# Altium PCB MT_MD_Converter.PcbDoc
Units mm, origin at the board's own origin, x right, y up, seen from the top; angles counter-clockwise.
Board outline 93.8 x 61.9 mm, 2 copper layers (Top Layer, Bottom Layer), stack 1.57 mm thick; 6 components, 61 nets, 224 pads, 50 vias.
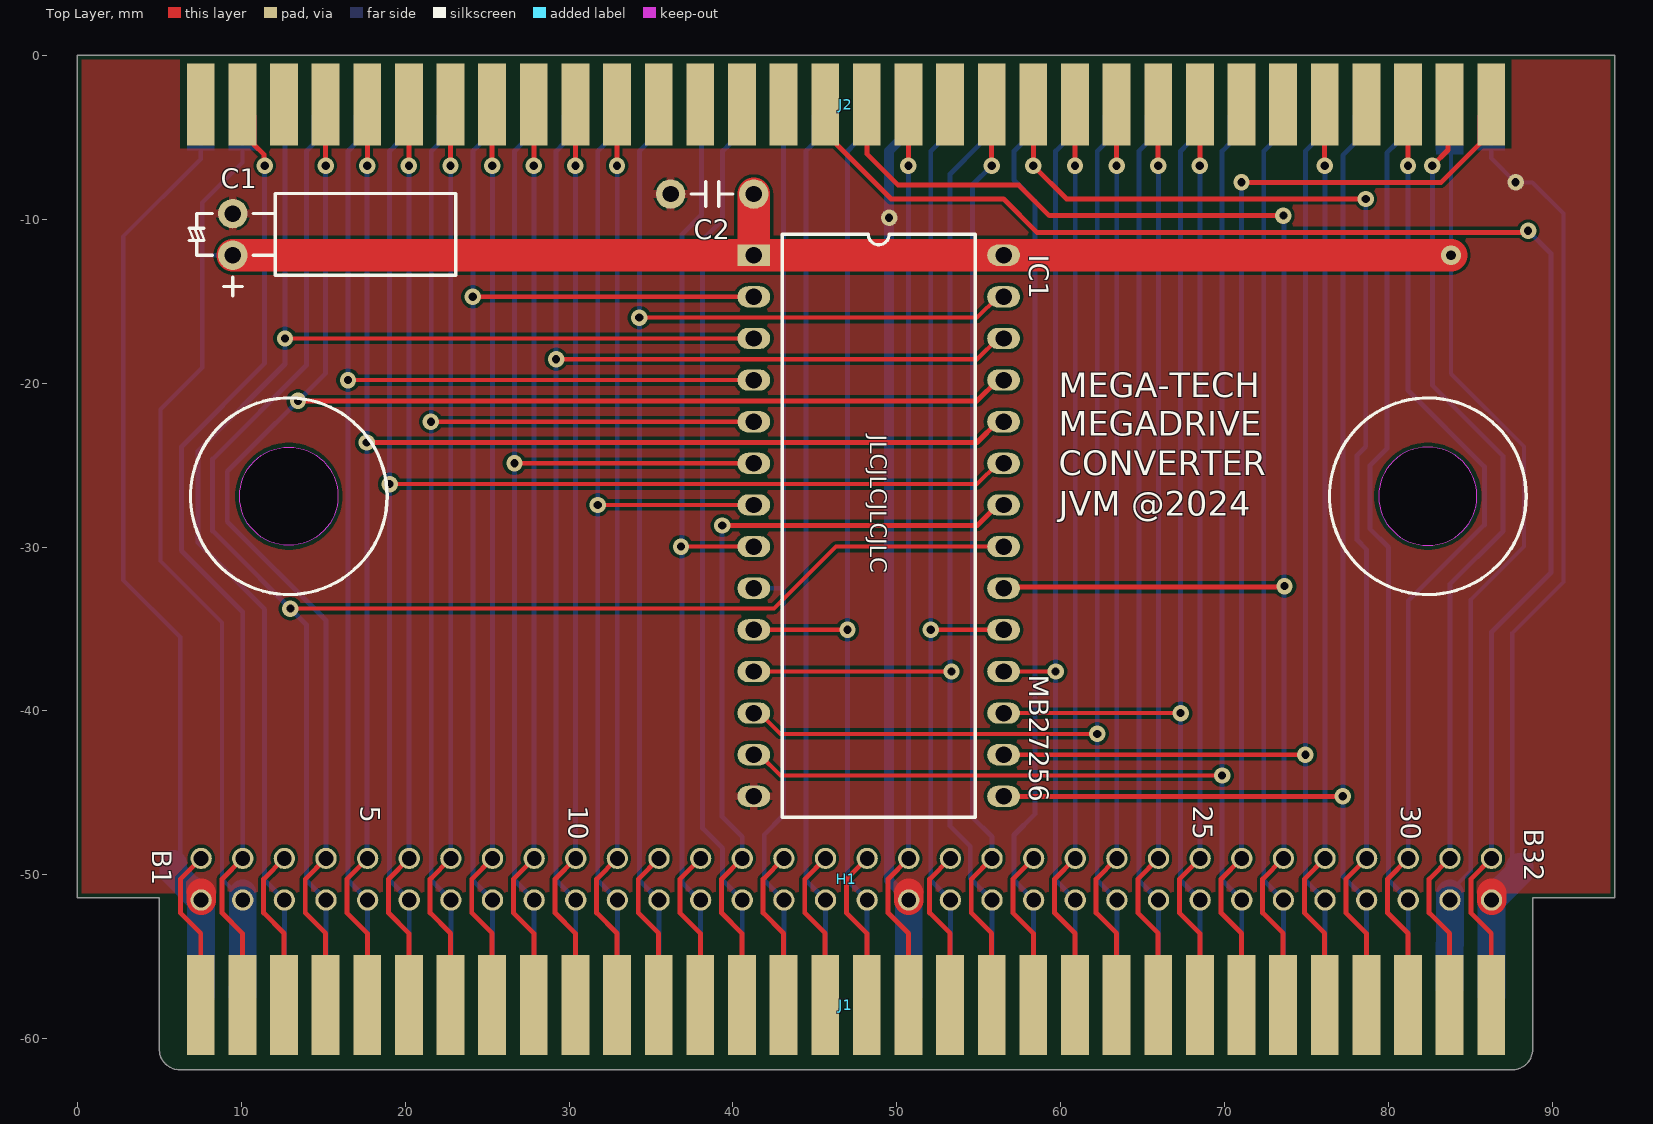
[diagram p0: Top Layer view]
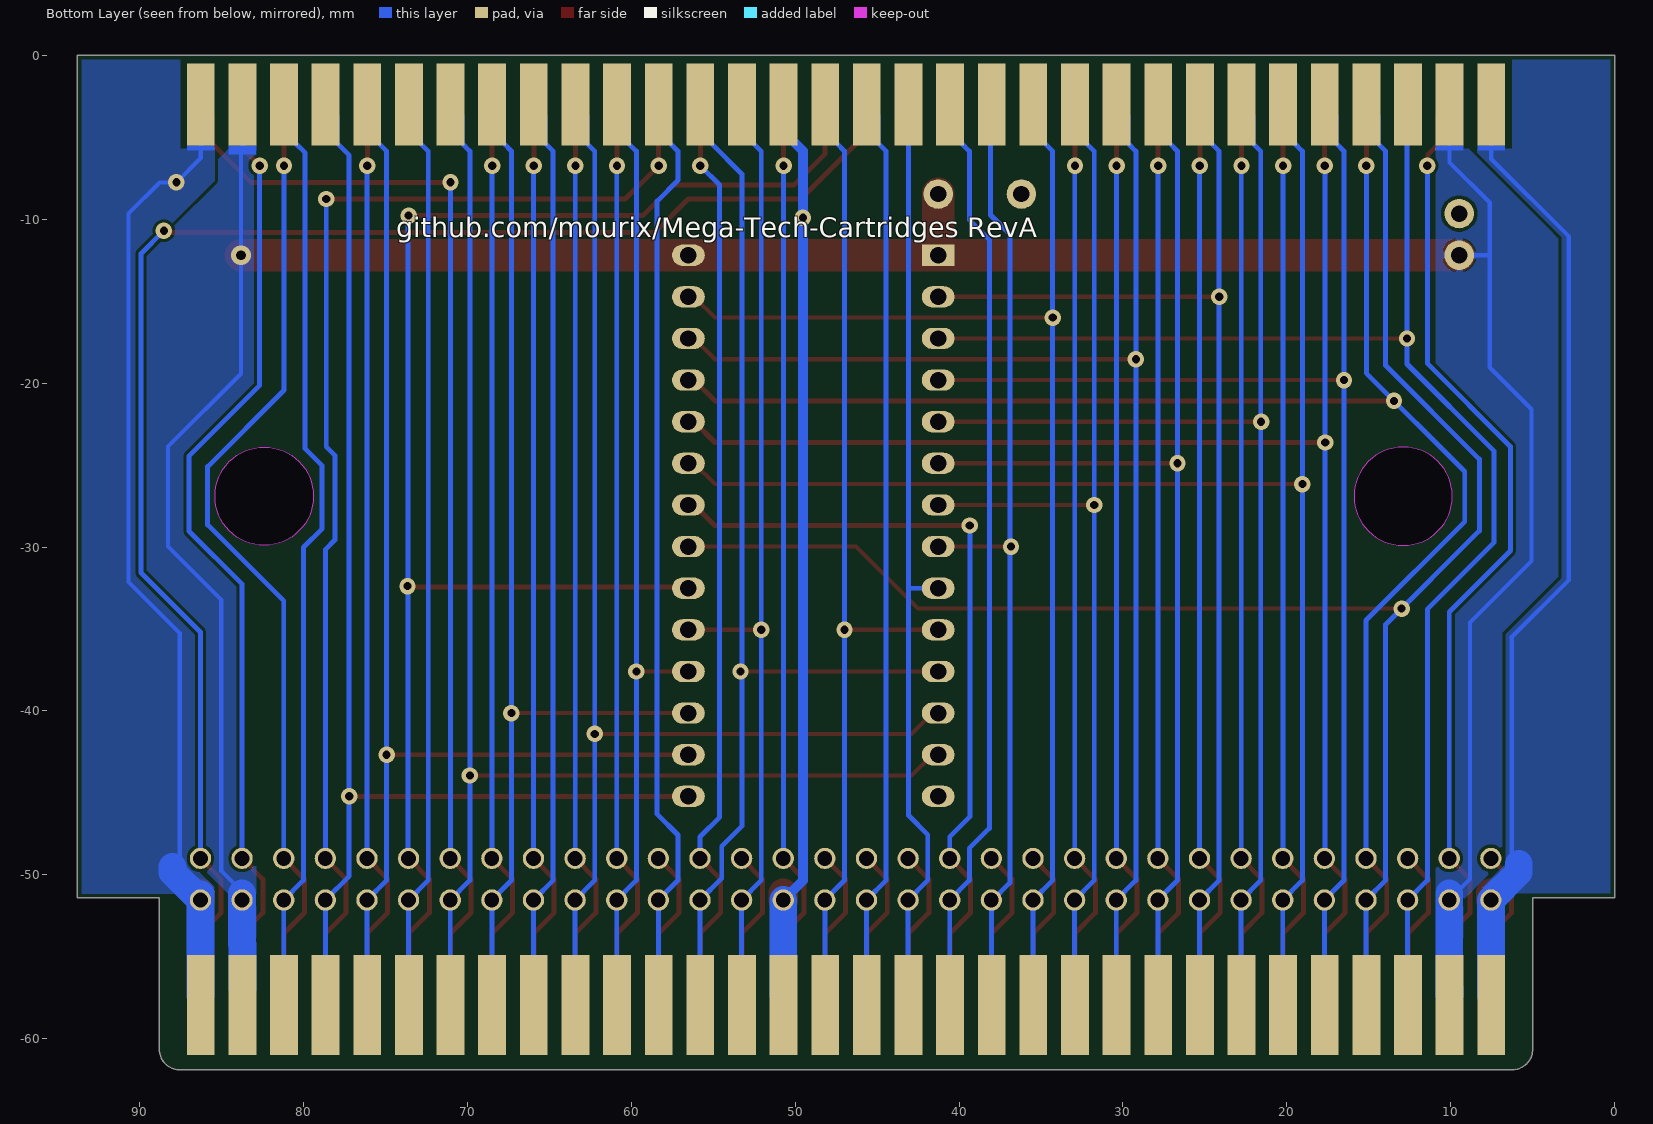
[diagram p1: Bottom Layer view, seen from below]

## Layer stack, top to bottom
Top Solder: solder mask 0.0127, Solder Resist, Dk 3.8
Top Layer: signal copper 0.035
Dielectric: core 1.5, FR-4, Dk 4.5
Bottom Layer: signal copper 0.035
Bottom Solder: solder mask 0.0127, Solder Resist, Dk 3.8

## Board outline
5,-60.632 5,-51.4 0,-51.4 0,0 93.8,0 93.8,-51.4 88.8,-51.4 88.8,-60.668 cw(c87.55,-60.65) 87.532,-61.9 87.55,-61.9 6.25,-61.9 6.232,-61.9 cw(c6.25,-60.65)
cut-out: 79.4,-26.9 ccw(c82.4,-26.9) 82.4,-29.9 ccw(c82.4,-26.9) 85.4,-26.9 ccw(c82.4,-26.9) 82.4,-23.9 ccw(c82.4,-26.9)
cut-out: 12.9,-29.9 cw(c12.9,-26.9) 9.9,-26.9 cw(c12.9,-26.9) 12.9,-23.9 cw(c12.9,-26.9) 15.9,-26.9 cw(c12.9,-26.9)

## Design rules (kind name [scope] priority, off if disabled: settings)
BoardOutlineClearance [not InComponent('J1')] p1: gap=0.254 ignorepadtopadclearanceinfootprint=FALSE
Clearance [All] p1: gap=0.2 ignorepadtopadclearanceinfootprint=FALSE except(0.15: Arc-Text Track-Text SMDPad-Text THPad-Text Via-Text Fill-Text Poly-Text Region-Text Text-Text; 0.25: Arc-Hole Track-Hole SMDPad-Hole THPad-Hole Via-Hole Fill-Hole Poly-Hole Region-Hole Text-Hole)
ComponentClearance [All] p1: gap=0.127 collisioncheckmode=3 verticalgap=0.127 showdistances=TRUE
DiffPairsRouting [All] p1: maxlimit=0.254 minlimit=0.127 mostfreqgap=0.127 toplayer_minwidth=0.127 toplayer_maxwidth=25.4 toplayer_prefwidth=0.127 bottomlayer_minwidth=0.127 bottomlayer_maxwidth=25.4 bottomlayer_prefwidth=0.127 maxuncoupledlength=12.7
Height [All] p1: minheight=0 maxheight=1816.048 prefheight=12.7
HoleSize [All] p1: absolutevalues=TRUE maxlimit=6.3 minlimit=0.3 maxpercent=80.000 minpercent=20.000
HoleToHoleClearance [All] p1: gap=0.25 allowstackedmicrovias=FALSE
MinimumAnnularRing [All] p1: minimumring=0.076
MinimumSolderMaskSliver [All] p1: minsoldermaskwidth=0.1
PlaneClearance [All] p1: clearance=0.15
PlaneConnect PlaneConnectPowerPads [InPadClass('PowerPads')] p1: planeconnectstyle=Direct reliefexpansion=0.508 reliefentries=4 reliefconductorwidth=0.254 reliefairgap=0.254
PlaneConnect [All] p2: pad.planeconnectstyle=Relief pad.reliefexpansion=0.3 pad.reliefentries=4 pad.reliefconductorwidth=0.127 pad.reliefairgap=0.127 via.planeconnectstyle=Direct via.reliefexpansion=0.3 via.reliefentries=4 via.reliefconductorwidth=0.127 via.reliefairgap=0.127
PolygonConnect PolygonConnect_via [IsVia] p1: connectstyle=Direct reliefconductorwidth=0.254 reliefentries=4 polygonreliefangle="90 Angle" airgapwidth=0.254
PolygonConnect [All] p2: connectstyle=Relief reliefconductorwidth=0.5 reliefentries=4 polygonreliefangle="90 Angle" airgapwidth=0.15
RoutingVias [All] p1: holewidth=0.3 width=0.6 viastyle="Through Hole" minholewidth=0.3 minwidth=0.6 maxholewidth=0.6 maxwidth=6.6
SilkToSilkClearance [All] p1: silktosilkclearance=0
SilkToSolderMaskClearance [IsPad] p1: minsilkscreentomaskgap=0.127 clearancetoexposedcopper=TRUE
SolderMaskExpansion SolderMaskExpansion_via [IsVia] p1: expansion=0.102 istentingtop=TRUE
SolderMaskExpansion [All] p2: expansion=0.1 istentingtop=FALSE
Width [All] p1: maxlimit=25.4 minlimit=0.15 preferedwidth=0.254 minimp=50.000000 maximp=50.000000 favimp=50.000000
20 further rules are at their usual default settings.

## Components (designator, comment, footprint, x,y, rotation, side; value= is the part's Value field where it differs from the comment)
C1 "Cap2.54P5.0D" "CapPol Mirror" 9.482,-10.922 r270 top value=47uF
C2 "CapCer" CapCer 38.735,-8.46 r0 top value=22nF
H1 "Header_2x32" Header_2x32 7.55,-49 r0 top locked
IC1 "27256" 27256 41.275,-12.192 r0 top
J1 "MT Cart Edge" MT_Cart_Edge 5,-61.9 r0 top locked
J2 "MD Cart Connector" MD_Cart_CON 5,-5.5 r0 top locked

## Footprints (in the part's own frame and the unit in brackets; to place one, negate y for a bottom-side part, rotate by r counter-clockwise, add the part's x,y. Pads: shape width x height; smd on the part's side, far side on the other; paste and mask are expansions set on the pad)
27256 [mm]
  rect 2x1.3 hole 1: 1(0,0)
  oval 2x1.3 hole 1: 2(0,-2.54) 3(0,-5.08) 4(0,-7.62) 5(0,-10.16) 6(0,-12.7) 7(0,-15.24) 8(0,-17.78) 9(0,-20.32) 10(0,-22.86) 11(0,-25.4) 12(0,-27.94) 13(0,-30.48) 14(0,-33.02) 15(15.24,-33.02) 16(15.24,-30.48) 17(15.24,-27.94) 18(15.24,-25.4) 19(15.24,-22.86) 20(15.24,-20.32) 21(15.24,-17.78) 22(15.24,-15.24) 23(15.24,-12.7) 24(15.24,-10.16) 25(15.24,-7.62) 26(15.24,-5.08) 27(15.24,-2.54) 28(15.24,0)
  silkscreen extent 1.73,-34.29 13.51,1.27, body extent 0,-35.31 15.24,2.03, height 5.79
CapCer [mm]
  round 1.8 hole 1: 1(-2.54,0) 2(2.54,0)
  silkscreen extent -1.27,-0.75 1.27,0.75
"CapPol Mirror" [mm]
  round 1.8 hole 1: 1(1.27,0) 2(-1.27,0)
  silkscreen extent -2.5,-2.68 3.75,13.6
Header_2x32 [mm]
  round 1.3 hole 0.9: A1(0,-2.54) A2(2.54,-2.54) A3(5.08,-2.54) A4(7.62,-2.54) A5(10.16,-2.54) A6(12.7,-2.54) A7(15.24,-2.54) A8(17.78,-2.54) A9(20.32,-2.54) A10(22.86,-2.54) A11(25.4,-2.54) A12(27.94,-2.54) A13(30.48,-2.54) A14(33.02,-2.54) A15(35.56,-2.54) A16(38.1,-2.54) A17(40.64,-2.54) A18(43.18,-2.54) A19(45.72,-2.54) A20(48.26,-2.54) A21(50.8,-2.54) A22(53.34,-2.54) A23(55.88,-2.54) A24(58.42,-2.54) A25(60.96,-2.54) A26(63.5,-2.54) A27(66.04,-2.54) A28(68.58,-2.54) A29(71.12,-2.54) A30(73.66,-2.54) A31(76.2,-2.54) A32(78.74,-2.54) B1(0,0) B2(2.54,0) B3(5.08,0) B4(7.62,0) B5(10.16,0) B6(12.7,0) B7(15.24,0) B8(17.78,0) B9(20.32,0) B10(22.86,0) B11(25.4,0) B12(27.94,0) B13(30.48,0) B14(33.02,0) B15(35.56,0) B16(38.1,0) B17(40.64,0) B18(43.18,0) B19(45.72,0) B20(48.26,0) B21(50.8,0) B22(53.34,0) B23(55.88,0) B24(58.42,0) B25(60.96,0) B26(63.5,0) B27(66.04,0) B28(68.58,0) B29(71.12,0) B30(73.66,0) B31(76.2,0) B32(78.74,0)
MD_Cart_CON [mm]
  rect 1.7x5 smd far side: A1(2.53,2.5) A2(5.07,2.5) A3(7.61,2.5) A4(10.15,2.5) A5(12.69,2.5) A6(15.23,2.5) A7(17.77,2.5) A8(20.31,2.5) A9(22.85,2.5) A10(25.39,2.5) A11(27.93,2.5) A12(30.47,2.5) A13(33.01,2.5) A14(35.55,2.5) A15(38.09,2.5) A16(40.63,2.5) A17(43.17,2.5) A18(45.71,2.5) A19(48.25,2.5) A20(50.79,2.5) A21(53.33,2.5) A22(55.87,2.5) A23(58.41,2.5) A24(60.95,2.5) A25(63.49,2.5) A26(66.03,2.5) A27(68.57,2.5) A28(71.11,2.5) A29(73.65,2.5) A30(76.19,2.5) A31(78.73,2.5) A32(81.27,2.5)
  rect 1.7x5 smd: B1(2.53,2.5) B2(5.07,2.5) B3(7.61,2.5) B4(10.15,2.5) B5(12.69,2.5) B6(15.23,2.5) B7(17.77,2.5) B8(20.31,2.5) B9(22.85,2.5) B10(25.39,2.5) B11(27.93,2.5) B12(30.47,2.5) B13(33.01,2.5) B14(35.55,2.5) B15(38.09,2.5) B16(40.63,2.5) B17(43.17,2.5) B18(45.71,2.5) B19(48.25,2.5) B20(50.79,2.5) B21(53.33,2.5) B22(55.87,2.5) B23(58.41,2.5) B24(60.95,2.5) B25(63.49,2.5) B26(66.03,2.5) B27(68.57,2.5) B28(71.11,2.5) B29(73.65,2.5) B30(76.19,2.5) B31(78.73,2.5) B32(81.27,2.5)
MT_Cart_Edge [mm]
  rect 1.7x6.1 smd far side: A1(2.53,3.95) A2(5.07,3.95) A3(7.61,3.95) A4(10.15,3.95) A5(12.69,3.95) A6(15.23,3.95) A7(17.77,3.95) A8(20.31,3.95) A9(22.85,3.95) A10(25.39,3.95) A11(27.93,3.95) A12(30.47,3.95) A13(33.01,3.95) A14(35.55,3.95) A15(38.09,3.95) A16(40.63,3.95) A17(43.17,3.95) A18(45.71,3.95) A19(48.25,3.95) A20(50.79,3.95) A21(53.33,3.95) A22(55.87,3.95) A23(58.41,3.95) A24(60.95,3.95) A25(63.49,3.95) A26(66.03,3.95) A27(68.57,3.95) A28(71.11,3.95) A29(73.65,3.95) A30(76.19,3.95) A31(78.73,3.95) A32(81.27,3.95)
  rect 1.7x6.1 smd: B1(2.53,3.95) B2(5.07,3.95) B3(7.61,3.95) B4(10.15,3.95) B5(12.69,3.95) B6(15.23,3.95) B7(17.77,3.95) B8(20.31,3.95) B9(22.85,3.95) B10(25.39,3.95) B11(27.93,3.95) B12(30.47,3.95) B13(33.01,3.95) B14(35.55,3.95) B15(38.09,3.95) B16(40.63,3.95) B17(43.17,3.95) B18(45.71,3.95) B19(48.25,3.95) B20(50.79,3.95) B21(53.33,3.95) B22(55.87,3.95) B23(58.41,3.95) B24(60.95,3.95) B25(63.49,3.95) B26(66.03,3.95) B27(68.57,3.95) B28(71.11,3.95) B29(73.65,3.95) B30(76.19,3.95) B31(78.73,3.95) B32(81.27,3.95)

## Part data
C1: library part Cap2.54P5.0D_mirror, "Polarized Capacitor, 2.54mm Pitch, 5mm Width, mirrored", Voltage=16V
C2: "Capacitor (THT), Ceramic, 5.08mm Pitch"
IC1: "256K EPROM"
J1: library part MT_CART_EDGE_CON
J2: library part MD_CART_CON

## Via types
v1: diameter 1, hole 0.5, Top Layer to Bottom Layer, tented both sides, 49 vias
v2: diameter 1.2, hole 0.6, Top Layer to Bottom Layer, tented both sides, 1 vias

## Nets (pads, with @x,y where several pads share a name; then routed paths per layer and width w, separated by ;. In a path a pad name is that pad's centre, name@x,y a point inside that pad or via, vN(x,y) a via of type N, cw(c..) or ccw(c..) an arc to the next point about the centre after c; other vN are vias at no path point)
A0: H1.A17 IC1.10 J1.A17 J2.A17 | length 61.1
  Top Layer w0.254: IC1.10 v1(46.99,-35.052)
  Bottom Layer w0.3: J2.A17 47.47,-3.7 47.47,-5.362 46.99,-5.842 46.99,-50.34 H1.A17 J1.A17@48.19,-57.38
A1: H1.A15 IC1.9 J1.A15 J2.A15 | length 57.2
  Bottom Layer w0.254: IC1.9 43.09,-32.512
  Bottom Layer w0.3: J2.A15 43.09,-8.941 43.09,-32.512 43.09,-46.374 41.91,-47.554 41.91,-50.34 H1.A15 J1.A15@43.11,-57.38
A2: H1.A13 IC1.8 J1.A13 J2.A13 | length 59.7
  Top Layer w0.254: v1(36.83,-29.972) IC1.8
  Bottom Layer w0.3: H1.A13@37.99,-51.579 36.9,-50.489 36.9,-29.972 36.9,-10.917 38.08,-9.737 J2.A13@38.08,-3.149 ; J1.A13@38.03,-57.38 H1.A13
A3: H1.A11 IC1.7 J1.A11 J2.A11 | length 64.9
  Top Layer w0.254: v1(31.75,-27.432) IC1.7
  Bottom Layer w0.3: J2.A11 32.23,-3.7 32.23,-5.362 31.75,-5.842 31.75,-50.34 H1.A11 J1.A11@32.95,-57.38
A4: H1.A9 IC1.6 J1.A9 J2.A9 | length 70
  Top Layer w0.254: v1(26.67,-24.892) IC1.6
  Bottom Layer w0.3: J2.A9 27.15,-3.7 27.15,-5.362 26.67,-5.842 26.67,-50.34 H1.A9 J1.A9@27.87,-57.38
A5: H1.A7 IC1.5 J1.A7 J2.A7 | length 75.1
  Top Layer w0.254: v1(21.568,-22.352) IC1.5
  Bottom Layer w0.3: J2.A7 22.07,-3.7 22.07,-5.362 21.59,-5.842 21.59,-50.34 H1.A7 J1.A7@22.79,-57.38
A6: H1.A5 IC1.4 J1.A5 J2.A5 | length 80.1
  Top Layer w0.254: v1(16.51,-19.812) IC1.4
  Bottom Layer w0.3: J2.A5 16.99,-3.7 16.99,-5.362 16.51,-5.842 16.51,-50.34 H1.A5 J1.A5@17.71,-57.38
A7: H1.A3 IC1.3 J1.A3 J2.A3 | length 87.4
  Top Layer w0.254: v1(12.665,-17.272) IC1.3
  Bottom Layer w0.3: J1.A3@12.61,-57.4 12.63,-57.38 H1.A3 11.43,-50.34 11.43,-33.803 7.366,-29.739 7.366,-24.13 12.665,-18.831 12.665,-3.055 J2.A3
A8: H1.B4 IC1.25 J1.B4 J2.B4 | length 104
  Top Layer w0.3: v1(13.462,-21.082) 54.895,-21.082 56.165,-19.812 IC1.25 ; J1.B4@15.15,-57.4 15.15,-53.569 13.905,-52.324 13.905,-50.265 H1.B4 ; v1(15.15,-6.731) J2.B4
  Bottom Layer w0.3: v1(15.15,-6.731) 15.15,-19.387 9.144,-25.393 9.144,-28.448 15.17,-34.474 H1.B4
A9: H1.B5 IC1.24 J1.B5 J2.B5 | length 94.9
  Top Layer w0.3: v1(17.653,-23.622) 54.895,-23.622 56.165,-22.352 IC1.24 ; J1.B5@17.69,-57.4 17.69,-53.569 16.445,-52.324 16.445,-50.265 H1.B5 ; v1(17.69,-6.731) J2.B5
  Bottom Layer w0.3: v1(17.69,-6.731) 17.672,-6.749 17.672,-23.603 v1(17.653,-23.622) 17.682,-23.651 17.682,-48.971 H1.B5
A10: H1.A4 IC1.21 J1.A4 J2.A4 | length 105.2
  Top Layer w0.254: v1(12.998,-33.758) 42.503,-33.758 46.289,-29.972 IC1.21
  Bottom Layer w0.3: J2.A4 14.45,-3.7 14.45,-5.362 13.97,-5.842 13.97,-18.923 8.255,-24.638 8.255,-29.015 13.97,-34.73 13.97,-50.34 H1.A4 J1.A4@15.17,-57.38
A11: H1.A6 IC1.23 J1.A6 J2.A6 | length 93.4
  Top Layer w0.254: v1(19.05,-26.162) 54.895,-26.162 56.165,-24.892 IC1.23
  Bottom Layer w0.3: J2.A6 19.53,-3.7 19.53,-5.362 19.05,-5.842 19.05,-50.34 H1.A6 J1.A6@20.25,-57.38
A12: H1.A8 IC1.2 J1.A8 J2.A8 | length 72.5
  Top Layer w0.254: v1(24.13,-14.732) IC1.2
  Bottom Layer w0.3: J2.A8 24.61,-3.7 24.61,-5.362 24.13,-5.842 24.13,-50.34 H1.A8 J1.A8@25.33,-57.38
A13: H1.A10 IC1.26 J1.A10 J2.A10 | length 83.2
  Top Layer w0.254: v1(29.21,-18.542) 54.895,-18.542 56.165,-17.272 IC1.26
  Bottom Layer w0.3: J2.A10 29.69,-3.7 29.69,-5.362 29.21,-5.842 29.21,-50.34 H1.A10 J1.A10@30.41,-57.38
A14: H1.A12 IC1.27 J1.A12 J2.A12 | length 78.1
  Top Layer w0.254: v1(34.29,-16.002) 54.895,-16.002 56.165,-14.732 IC1.27
  Bottom Layer w0.3: J2.A12 34.77,-3.7 34.77,-5.362 34.29,-5.842 34.29,-50.34 H1.A12 J1.A12@35.49,-57.38
A15: H1.A14 J1.A14 J2.A14 | length 56.4
  Bottom Layer w0.3: J2.A14 39.85,-3.7 39.85,-5.362 39.37,-5.842 39.37,-10.033 38.148,-11.255 38.148,-47.165 39.37,-48.387 39.37,-50.34 H1.A14 J1.A14@40.57,-57.38
A16: H1.A16 J1.A16 J2.A16 | length 55.4
  Bottom Layer w0.3: J2.A16 44.93,-3.7 44.93,-5.362 44.45,-5.842 44.45,-50.34 H1.A16 J1.A16@45.65,-57.38
A17: H1.B6 J1.B6 J2.B6 | length 55.4
  Top Layer w0.3: J1.B6@20.23,-57.4 20.23,-53.569 18.985,-52.324 18.985,-50.265 H1.B6 ; v1(20.23,-6.731) J2.B6
  Bottom Layer w0.3: v1(20.23,-6.731) 20.24,-6.741 20.24,-48.99 H1.B6
A18: H1.B7 J1.B7 J2.B7 | length 55.4
  Top Layer w0.3: J1.B7@22.77,-57.4 22.77,-53.569 21.525,-52.324 21.525,-50.265 H1.B7 ; v1(22.77,-6.731) J2.B7
  Bottom Layer w0.3: v1(22.77,-6.731) 22.78,-6.741 22.78,-48.99 H1.B7
A19: H1.B8 J1.B8 J2.B8 | length 55.4
  Top Layer w0.3: J1.B8@25.31,-57.4 25.31,-53.569 24.065,-52.324 24.065,-50.265 H1.B8 ; v1(25.31,-6.731) J2.B8
  Bottom Layer w0.3: v1(25.31,-6.731) 25.32,-6.741 25.32,-48.99 H1.B8
A20: H1.B9 J1.B9 J2.B9 | length 55.4
  Top Layer w0.3: J1.B9@27.85,-57.4 27.85,-53.569 26.605,-52.324 26.605,-50.265 H1.B9 ; v1(27.85,-6.731) J2.B9
  Bottom Layer w0.3: v1(27.85,-6.731) 27.86,-6.741 27.86,-48.99 H1.B9
A21: H1.B10 J1.B10 J2.B10 | length 55.4
  Top Layer w0.3: J1.B10@30.39,-57.4 30.39,-53.569 29.145,-52.324 29.145,-50.265 H1.B10 ; v1(30.39,-6.731) J2.B10
  Bottom Layer w0.3: v1(30.39,-6.731) 30.4,-6.741 30.4,-48.99 H1.B10
A22: H1.B11 J1.B11 J2.B11 | length 55.4
  Top Layer w0.3: J1.B11@32.93,-57.4 32.93,-53.569 31.685,-52.324 31.685,-50.265 H1.B11 ; v1(32.93,-6.731) J2.B11
  Bottom Layer w0.3: v1(32.93,-6.731) 32.94,-6.741 32.94,-48.99 H1.B11
AS: H1.B18 J1.B18 J2.B18 | length 55.4
  Top Layer w0.3: J1.B18@50.71,-57.4 50.71,-53.569 49.465,-52.324 49.465,-50.265 H1.B18 ; v1(50.71,-6.731) J2.B18
  Bottom Layer w0.3: v1(50.71,-6.731) 50.72,-6.741 50.72,-48.99 H1.B18
CART: H1.B26 J1.B26 J2.B32 | length 68.9
  Top Layer w0.3: J1.B26@71.03,-57.4 71.03,-53.569 69.785,-52.324 69.785,-50.265 H1.B26 ; v1(71.03,-7.747) 83.212,-7.747 85.57,-5.389 85.57,-3.7 J2.B32
  Bottom Layer w0.3: v1(71.03,-7.747) 71.04,-7.757 71.04,-48.99 H1.B26
CAS0: H1.B32 J1.B32 J2.B16 | length 97
  Top Layer w0.3: J2.B16 46.33,-3.7 46.33,-5.436 49.657,-8.763 56.515,-8.763 58.547,-10.795 88.427,-10.795 v1(88.519,-10.703) ; J1.B32@86.27,-57.4 86.27,-56.95 86.27,-53.569 85.025,-52.324 85.025,-50.265 H1.B32
  Bottom Layer w0.3: H1.B32 86.29,-35.195 89.916,-31.569 89.916,-12.1 v1(88.519,-10.703)
CAS0NC: H1.B16 J1.B16 | length 9.4
  Top Layer w0.3: J1.B16@45.63,-57.4 45.63,-53.569 44.385,-52.324 44.385,-50.265 H1.B16
CAS2: H1.B29 J1.B29 J2.B21 | length 75
  Top Layer w0.3: J2.B21 v1(58.33,-6.731) 60.362,-8.763 v1(78.613,-8.763) ; J1.B29@78.65,-57.4 78.65,-56.95 78.65,-53.569 77.405,-52.324 77.405,-50.265 H1.B29
  Bottom Layer w0.3: v1(78.613,-8.763) 78.613,-23.876 78.086,-24.403 78.086,-29.572 78.67,-30.156 H1.B29
CEO: H1.B27 IC1.20 J1.B27 J2.B17 | length 96.1
  Top Layer w0.3: J2.B17 48.17,-6.006 50.085,-7.921 57.451,-7.921 59.309,-9.779 v1(73.59,-9.779) ; IC1.20 56.578,-32.448 73.596,-32.448 v1(73.66,-32.385) ; J1.B27@73.57,-57.4 73.57,-56.95 73.57,-53.569 72.325,-52.324 72.325,-50.265 H1.B27 H1.B27@73.59,-48.773
  Bottom Layer w0.3: H1.B27 73.625,-48.965 73.625,-32.42 v1(73.66,-32.385) 73.625,-32.35 73.625,-9.814 v1(73.59,-9.779)
CEONC: H1.B17 J1.B17 | length 9.4
  Top Layer w0.3: J1.B17@48.17,-57.4 48.17,-53.569 46.925,-52.324 46.925,-50.265 H1.B17
D0: H1.A20 IC1.11 J1.A20 J2.A20 | length 68.6
  Top Layer w0.254: IC1.11 v1(53.34,-37.592)
  Bottom Layer w0.3: J2.A20 55.09,-3.7 55.09,-5.399 53.25,-7.239 53.25,-37.502 v1(53.34,-37.592) 53.25,-37.682 53.25,-47.027 54.483,-48.26 54.483,-50.213 H1.A20 J1.A20@55.81,-57.38
D1: H1.A23 IC1.12 J1.A23 J2.A23 | length 76.8
  Top Layer w0.254: IC1.12 41.625,-40.132 42.895,-41.402 v1(62.23,-41.402)
  Bottom Layer w0.3: J2.A23 62.71,-3.7 62.71,-5.362 62.23,-5.842 62.23,-50.34 H1.A23 J1.A23@63.43,-57.38
D2: H1.A26 IC1.13 J1.A26 J2.A26 | length 84.5
  Top Layer w0.254: IC1.13 41.625,-42.672 42.895,-43.942 v1(69.85,-43.942)
  Bottom Layer w0.3: J2.A26 70.33,-3.7 70.33,-5.362 69.85,-5.842 69.85,-50.34 H1.A26 J1.A26@71.05,-57.38
D3: H1.A29 IC1.15 J1.A29 J2.A29 | length 76.3
  Top Layer w0.3: IC1.15 v1(77.216,-45.212)
  Bottom Layer w0.3: J2.A29 77.95,-3.7 77.95,-5.362 77.216,-6.096 77.216,-50.086 H1.A29 J1.A29@78.67,-57.38
D4: H1.A28 IC1.16 J1.A28 J2.A28 | length 73.8
  Top Layer w0.254: IC1.16 v1(74.93,-42.672)
  Bottom Layer w0.3: J2.A28 75.41,-3.7 75.41,-5.362 74.93,-5.842 74.93,-50.34 H1.A28 J1.A28@76.13,-57.38
D5: H1.A25 IC1.17 J1.A25 J2.A25 | length 66.2
  Top Layer w0.254: IC1.17 v1(67.315,-40.132)
  Bottom Layer w0.3: J2.A25 67.79,-3.7 67.79,-5.362 67.31,-5.842 67.31,-50.34 H1.A25 J1.A25@68.51,-57.38
D6: H1.A22 IC1.18 J1.A22 J2.A22 | length 56.6
  Top Layer w0.254: IC1.18 v1(59.69,-37.592)
  Bottom Layer w0.3: J2.A22@60.706,-4.826 59.69,-5.842 59.69,-7.874 59.69,-50.34 H1.A22 J1.A22@60.89,-57.38
D7: H1.A19 IC1.19 J1.A19 J2.A19 | length 59.8
  Top Layer w0.254: v1(52.07,-35.052) IC1.19
  Bottom Layer w0.3: J2.A19 52.55,-3.7 52.55,-5.362 52.07,-5.842 52.07,-50.34 H1.A19 J1.A19@53.27,-57.38
D8: H1.A21 J1.A21 J2.A21 | length 54.2
  Bottom Layer w0.3: J2.A21@57.912,-5.08 57.15,-5.842 57.15,-7.62 58.42,-8.89 58.42,-46.305 57.15,-47.575 57.15,-50.34 H1.A21 J1.A21@58.35,-57.38
D9: H1.A24 J1.A24 J2.A24 | length 55.4
  Bottom Layer w0.3: J2.A24 65.25,-3.7 65.25,-5.362 64.77,-5.842 64.77,-50.34 H1.A24 J1.A24@65.97,-57.38
D10: H1.A27 J1.A27 J2.A27 | length 55.4
  Bottom Layer w0.3: J2.A27 72.87,-3.7 72.87,-5.362 72.39,-5.842 72.39,-50.34 H1.A27 J1.A27@73.59,-57.38
D11: H1.A30 J1.A30 J2.A30 | length 56.3
  Bottom Layer w0.3: J2.A30 80.49,-3.7 80.49,-5.362 79.9,-5.952 79.9,-24.003 78.867,-25.036 78.867,-28.884 80.01,-30.027 80.01,-50.34 H1.A30 J1.A30@81.21,-57.38
D12: H1.B25 J1.B25 J2.B25 | length 55.9
  Top Layer w0.3: J1.B25@68.49,-57.4 68.49,-53.569 67.245,-52.324 67.245,-50.265 H1.B25 68.748,-48.762 H1.B25@68.889,-48.762 ; v1(68.49,-6.731) J2.B25
  Bottom Layer w0.3: v1(68.49,-6.731) 68.5,-6.741 68.5,-48.99 H1.B25
D13: H1.B24 J1.B24 J2.B24 | length 55.4
  Top Layer w0.3: J1.B24@65.95,-57.4 65.95,-53.569 64.705,-52.324 64.705,-50.265 H1.B24 ; v1(65.95,-6.731) J2.B24
  Bottom Layer w0.3: v1(65.95,-6.731) 65.96,-6.741 65.96,-48.99 H1.B24
D14: H1.B23 J1.B23 J2.B23 | length 55.4
  Top Layer w0.3: J1.B23@63.41,-57.4 63.41,-53.569 62.165,-52.324 62.165,-50.265 H1.B23 ; v1(63.41,-6.731) J2.B23
  Bottom Layer w0.3: v1(63.41,-6.731) 63.42,-6.741 63.42,-48.99 H1.B23
D15: H1.B22 J1.B22 J2.B22 | length 55.4
  Top Layer w0.3: J1.B22@60.87,-57.4 60.87,-53.569 59.625,-52.324 59.625,-50.265 H1.B22 ; v1(60.87,-6.731) J2.B22
  Bottom Layer w0.3: H1.B22 v1@60.89,-6.751
DTACK: H1.B20 J1.B20 J2.B20 | length 56.4
  Top Layer w0.3: J1.B20@55.79,-57.4 55.79,-53.569 54.545,-52.324 54.545,-50.265 H1.B20 ; v1(55.79,-6.731) J2.B20
  Bottom Layer w0.3: v1(55.79,-6.731) 54.61,-7.911 54.61,-46.482 55.81,-47.682 H1.B20
GND: C1.2 C2.1 H1.A1 H1.A18 H1.A32 IC1.14 J1.A1 J1.A18 J1.A32 J2.A1 J2.A18 J2.A32 | length 171.8
  Top Layer w1.8: H1.A1 H1.A1@7.55,-51.139 ; H1.A18 H1.A18@50.73,-51.139 ; H1.A32 H1.A32@86.29,-51.139
  Bottom Layer w0.254: 6.277,-49.328 6.277,-35.487 2.794,-32.004 2.794,-11.049 7.53,-6.313 J2.A1 ; J1.A18@50.71,-57.4 J1.A18@50.73,-57.38 ; J2.A32@86.27,-4.763 86.27,-5.643 ; 86.97,-5.643 86.27,-5.643 ; 87.557,-49.53 87.557,-35.25 90.678,-32.129 90.678,-9.652 88.773,-7.747 v1(87.757,-7.747) 86.27,-6.26 86.27,-5.643
  Bottom Layer w0.3: J1.A1@7.53,-57.4 J1.A1@7.55,-57.38
  Bottom Layer w0.6: H1.A18 49.53,-50.34 v1(49.53,-9.906) 49.53,-5.842 J2.A18@50.927,-4.445
  Bottom Layer w1.7: 5.85,-49.328 5.85,-49.84 H1.A1 J1.A1@7.55,-57.38 ; J1.A18@50.73,-57.38 H1.A18 ; J1.A32@86.29,-57.38 H1.A32 ; H1.A32@86.29,-51.191 H1.A32 ; 87.99,-49.53 87.99,-49.84 H1.A32
H_RESET: H1.B2 J1.B2 J2.B2 | length 59.7
  Top Layer w0.3: J1.B2@10.07,-57.4 10.07,-53.569 8.825,-52.324 8.825,-50.265 H1.B2 ; J2.B2 10.77,-3.7 10.77,-5.436 11.376,-6.042 11.376,-6.677 v1(11.43,-6.731)
  Bottom Layer w0.3: H1.B2 10.09,-33.966 6.35,-30.226 6.35,-23.876 11.43,-18.796 v1(11.43,-6.731)
LWR: H1.B28 J1.B28 J2.B28 | length 55.4
  Top Layer w0.3: J1.B28@76.11,-57.4 76.11,-53.569 74.865,-52.324 74.865,-50.265 H1.B28 ; v1(76.11,-6.731) J2.B28
  Bottom Layer w0.3: v1(76.11,-6.731) 76.12,-6.741 76.12,-48.99 H1.B28
M3: H1.B30 J1.B30 J2.B30 | length 59.3
  Top Layer w0.3: J1.B30@81.19,-57.4 81.19,-56.95 81.19,-53.569 79.945,-52.324 79.945,-50.265 H1.B30 ; v1(81.19,-6.731) J2.B30
  Bottom Layer w0.3: v1(81.19,-6.731) 81.19,-20.43 85.852,-25.092 85.852,-28.644 81.21,-33.286 H1.B30
NC0: H1.B1 J1.B1 | length 9.4
  Top Layer w0.3: J1.B1@7.53,-57.4 7.53,-53.569 6.285,-52.324 6.285,-50.265 H1.B1
NC1: H1.B3 J1.B3 | length 9.4
  Top Layer w0.3: J1.B3@12.61,-57.4 12.61,-53.569 11.365,-52.324 11.365,-50.265 H1.B3
NC2: H1.B12 J1.B12 | length 9.4
  Top Layer w0.3: J1.B12@35.47,-57.4 35.47,-53.569 34.225,-52.324 34.225,-50.265 H1.B12
NC3: H1.B13 J1.B13 | length 9.4
  Top Layer w0.3: J1.B13@38.01,-57.4 38.01,-53.569 36.765,-52.324 36.765,-50.265 H1.B13
NC4: H1.B15 J1.B15 | length 9.4
  Top Layer w0.3: J1.B15@43.09,-57.4 43.09,-53.569 41.845,-52.324 41.845,-50.265 H1.B15
NC5: H1.B19 J1.B19 | length 9.4
  Top Layer w0.3: J1.B19@53.25,-57.4 53.25,-53.569 52.005,-52.324 52.005,-50.265 H1.B19
NC6: H1.B21 J1.B21 | length 9.4
  Top Layer w0.3: J1.B21@58.33,-57.4 58.33,-53.569 57.085,-52.324 57.085,-50.265 H1.B21
OE: H1.B14 IC1.22 J1.B14 | length 48
  Top Layer w0.3: v1(39.345,-28.685) 54.912,-28.685 56.165,-27.432 IC1.22 ; J1.B14@40.55,-57.4 40.55,-53.569 39.305,-52.324 39.305,-50.265 H1.B14
  Bottom Layer w0.3: v1(39.345,-28.685) 39.345,-46.457 40.57,-47.682 H1.B14
TIME: H1.B31 J1.B31 J2.B31 | length 59
  Top Layer w0.3: v1(82.677,-6.731) 83.634,-5.774 83.634,-3.096 J2.B31 ; J1.B31@83.73,-57.4 83.73,-56.95 83.73,-53.569 82.485,-52.324 82.485,-50.265 H1.B31
  Bottom Layer w0.3: v1(82.677,-6.731) 82.677,-20.139 86.995,-24.457 86.995,-29.022 83.75,-32.267 H1.B31
VCC: C1.1 C2.2 H1.A2 H1.A31 IC1.1 IC1.28 J1.A2 J1.A31 J2.A2 J2.A31 | length 196
  Top Layer w2: C1.1 IC1.1 ; C2.2 IC1.1 ; v2(83.82,-12.192) IC1.1
  Bottom Layer w0.254: C1.1 7.62,-12.192 ; J2.A2 10.07,-6.536 7.62,-8.986 7.62,-12.192 ; H1.A2 8.817,-50.267 8.817,-34.598 5.08,-30.861 5.08,-21.59 7.62,-19.05 7.62,-12.37 7.62,-12.192 ; J2.A31@83.502,-4.763 83.742,-5.002 83.742,-5.893 83.797,-5.893 83.82,-5.916 83.82,-19.425 88.265,-23.87 88.265,-29.972 85.017,-33.22 85.017,-49.769 83.95,-50.836 83.95,-51.34 H1.A31
  Bottom Layer w0.8: J2.A2@10.148,-4.572 J2.A2@10.414,-4.572
  Bottom Layer w1.7: J1.A2@10.07,-57.4 J1.A2@10.07,-56.95 ; J1.A2@10.09,-57.38 H1.A2 H1.A2@10.09,-51.139 ; J1.A31@83.73,-56.93 83.73,-54.252 83.75,-54.232 H1.A31 H1.A31@83.75,-51.139
pads on no net: J2.B1 J2.B3 J2.B12 J2.B13 J2.B14 J2.B15 J2.B19 J2.B26 J2.B27 J2.B29

## Polygon pours and split planes (outlines as drawn)
GND on Bottom Layer "GND_L02_P004" (solid, remove dead copper, pour order 4): 85.458,-51.141 85.458,-50.738 86.319,-49.877 86.319,-35.166 90.17,-31.315 90.17,-12.394 85.42,-7.644 85.42,-5.492 87.249,-5.492 87.249,0 93.8,0 93.8,-51.141
VCC on Bottom Layer "VCC_L02_P005" (solid, remove dead copper, pour order 5): 84.527,-5.65 82.878,-5.65 82.878,-53.848 84.595,-53.848 84.595,-51.147 86.319,-49.423 86.319,-35.22 89.916,-31.623 89.916,-12.392 85.227,-7.703 85.227,-6.35
VCC on Bottom Layer "VCC_L02_P002" (solid, remove dead copper, pour order 2): 10.922,-5.366 10.922,-53.848 9.232,-53.848 9.232,-51.523 6.858,-49.149 6.858,-35.236 3.429,-31.807 3.429,-11.184 9.247,-5.366
GND on Bottom Layer "GND_L02_P003" (solid, remove dead copper, pour order 3): 8.472,-51.141 6.649,-49.317 6.649,-34.994 3.429,-31.774 3.429,-11.184 8.38,-6.233 8.38,0 0,0 0,-51.141
GND on Top Layer "GND_L01_P001" (solid, remove dead copper, pour order 1): 0,-51.139 0,0 93.8,0 93.8,-51.139

## Other copper
Top Layer:
  pour cut-out: 6.232,0 6.232,-5.7 87.532,-5.7 87.532,0
Bottom Layer:
  rectangle net VCC: 82.88,-5.793 84.58,-5.492
  rectangle net GND: 85.42,-5.793 87.12,-5.492
  rectangle net VCC: 82.892,-6.043 84.592,-5.742
  rectangle net VCC: 9.22,-5.793 10.92,-5.492
  rectangle net GND: 6.68,-5.793 8.38,-5.492
  pour cut-out: 6.232,0 6.232,-5.7 87.532,-5.7 87.532,0

## Silkscreen, mask and mechanical layers (free items; w line width, h text height)
Top Overlay:
  circle w0.2: c82.4,-26.9 r6
  circle w0.2: c12.9,-26.9 r6
  text "MEGA-TECH" at 59.894,-20.846 h1.5
  text "JLCJLCJLCJLC" at 48.369,-23.157 h1 r270
  text "MEGADRIVE" at 59.894,-23.195 h1.5
  text "CONVERTER" at 59.894,-25.608 h1.5
  text "JVM @2024" at 59.894,-28.091 h1.5
  text "MB27256" at 58.074,-37.792 h1.2 r270
  text "5" at 17.28,-45.793 h1.2 r270
  text "10" at 29.98,-45.793 h1.2 r270
  text "25" at 68.08,-45.793 h1.2 r270
  text "30" at 80.78,-45.793 h1.2 r270
  text "B32" at 88.273,-47.2 h1.2 r270
  text "B1" at 4.58,-48.46 h1.2 r270
Bottom Overlay:
  text "github.com/mourix/Mega-Tech-Cartridges RevA" at 74.349,-11.1 h1.2
Top Solder:
  rectangle: 5,-61.9 88.8,-54.8
Bottom Solder:
  rectangle: 5,-61.9 88.8,-54.8
Mechanical 1:
  circle w0.15: c12.9,-26.9 r3
  circle w0.15: c82.4,-26.9 r3
  lines w0.15: 6.232,-61.9 cw(c6.25,-60.65) 5,-60.632 5,-51.4 0,-51.4 0,0 93.8,0 93.8,-51.4 88.8,-51.4 88.8,-60.668 cw(c87.55,-60.65) 87.532,-61.9 ; 6.25,-61.9 87.55,-61.9